# Altium PCB PCB_Sixth-Sense_2026-08-17.pcbdoc
Units mil, origin at the board's own origin, x right, y up, seen from the top; angles counter-clockwise.
Board outline 2630 x 2450 mil, 2 copper layers (Top Layer, Bottom Layer); 59 components, 43 nets, 260 pads, 59 vias.
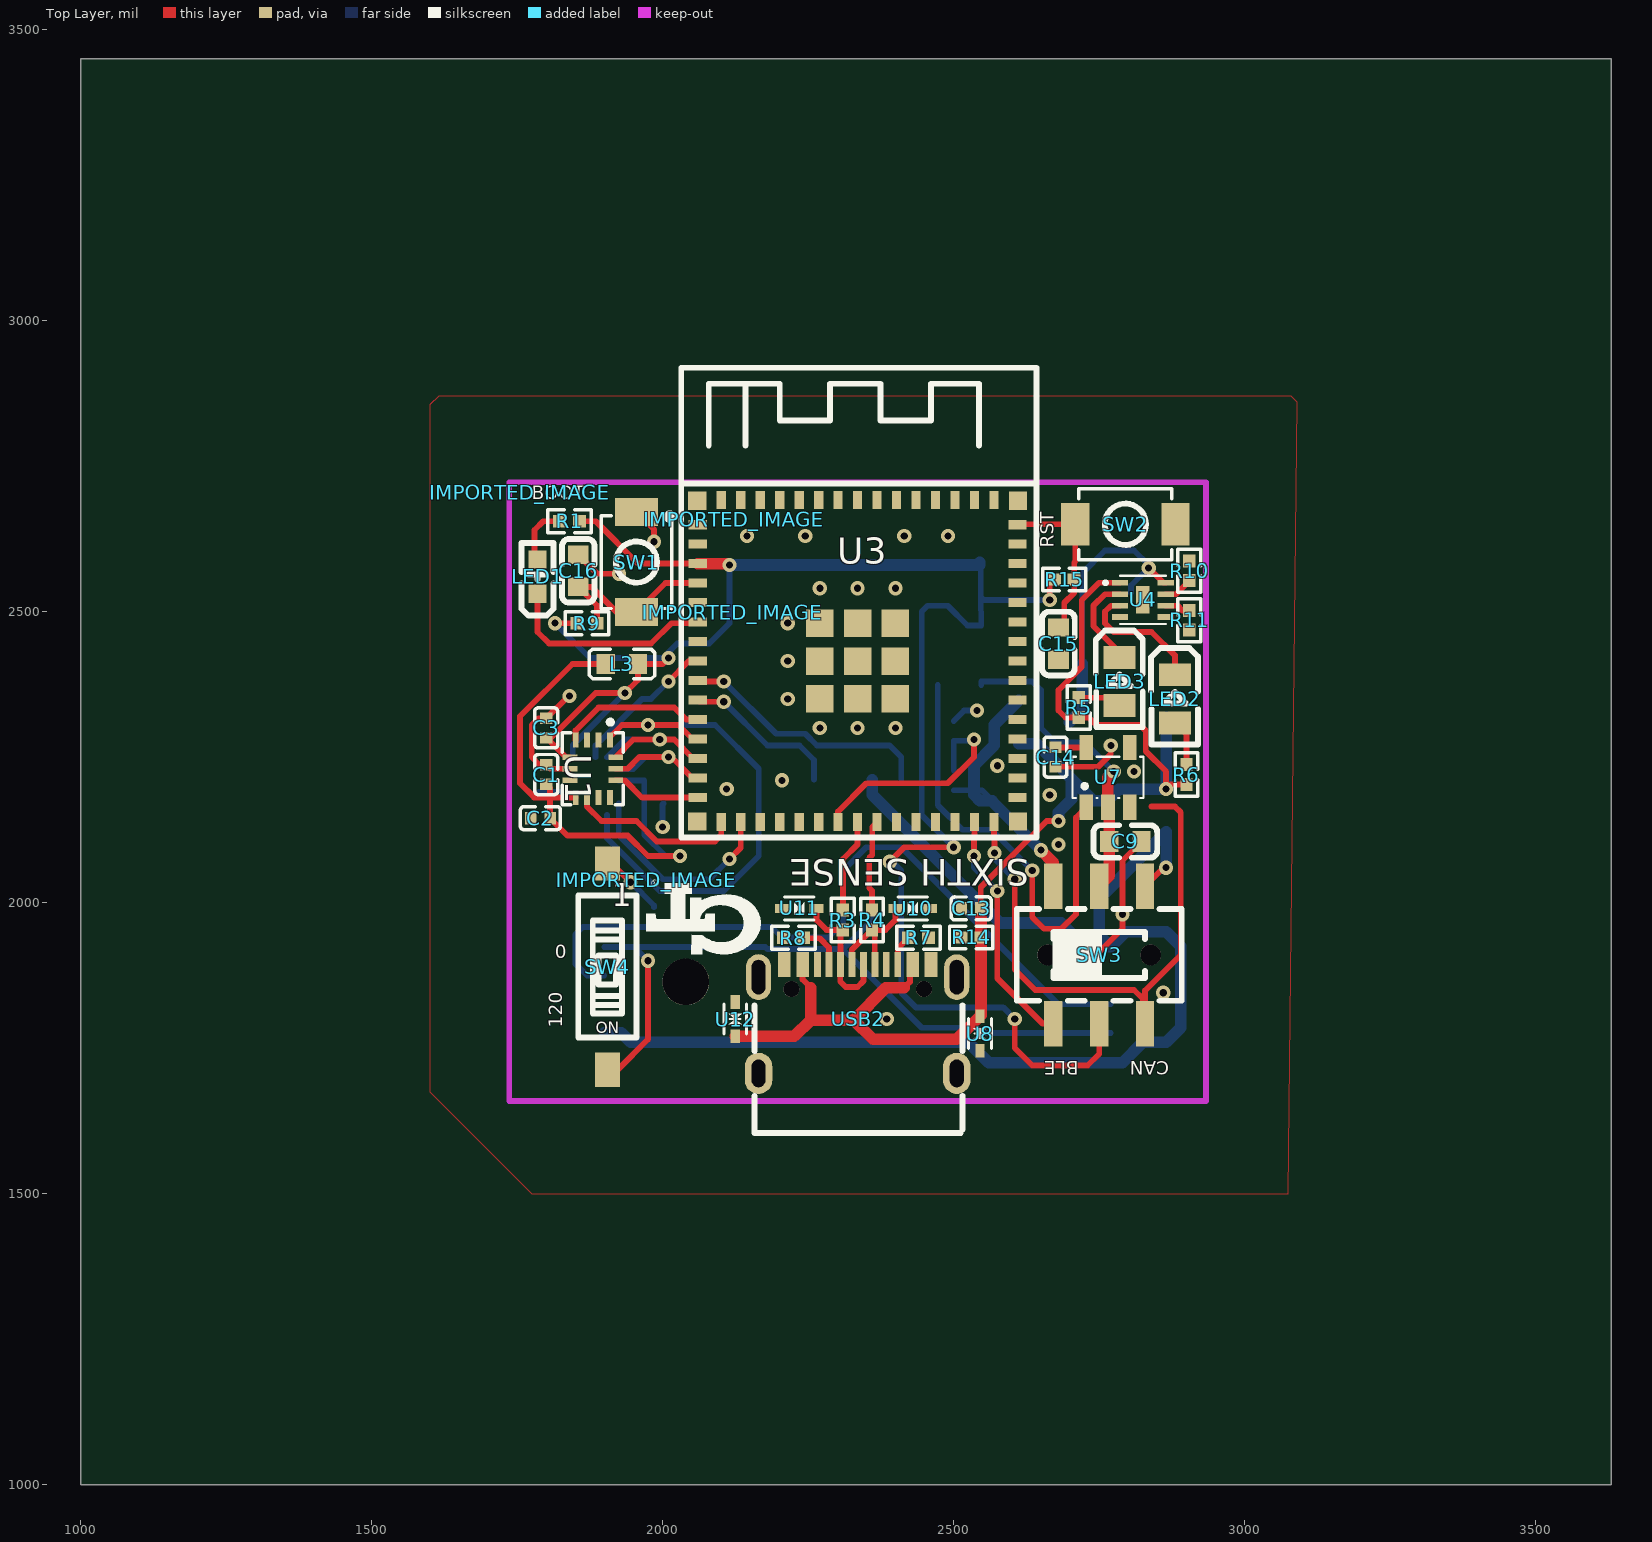
[diagram p0: Top Layer view]
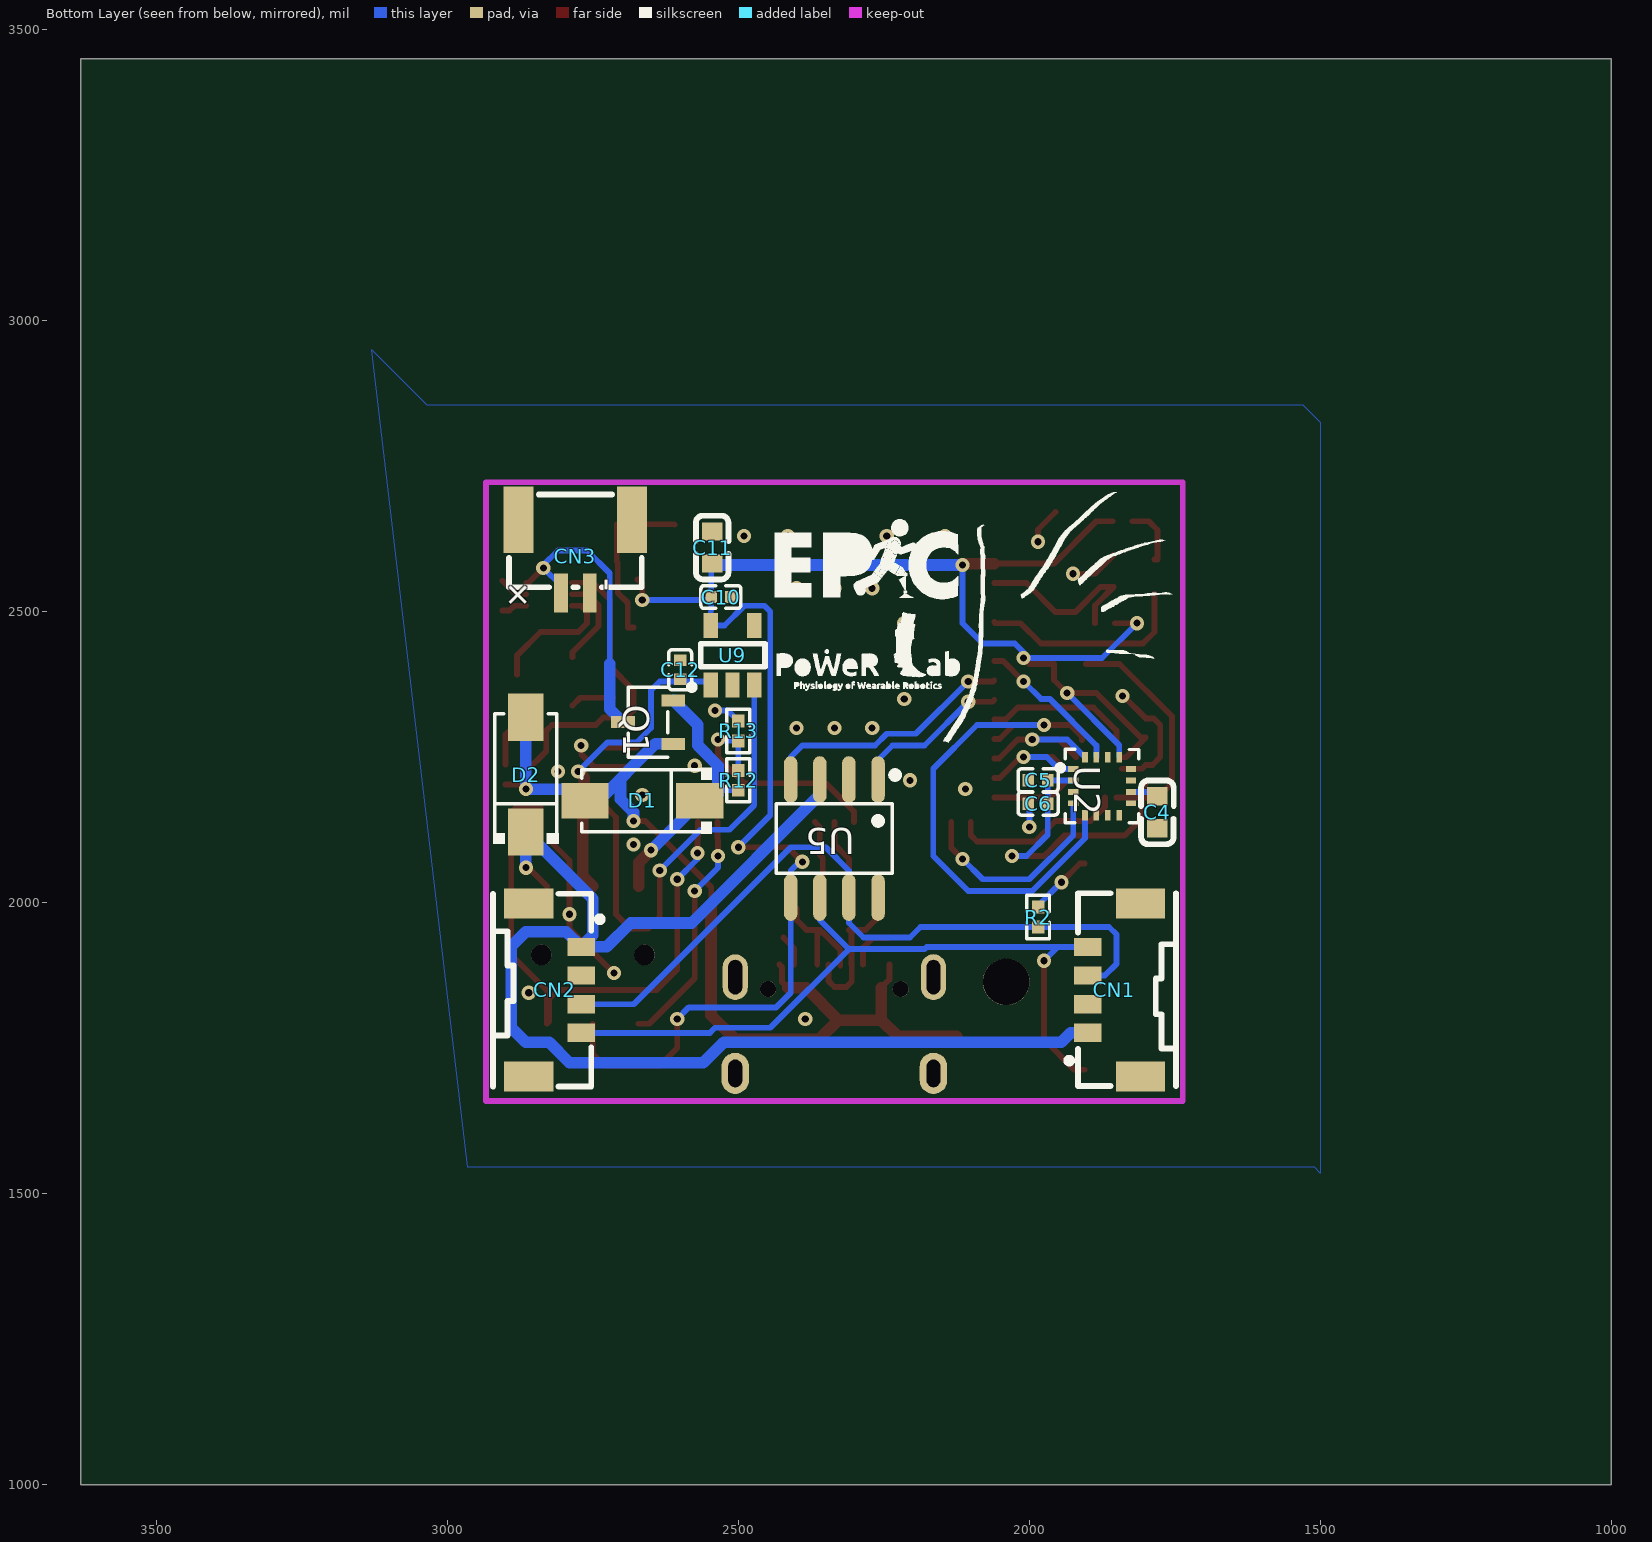
[diagram p1: Bottom Layer view, seen from below]

## Layer stack, top to bottom
Top Layer: signal copper (thickness not stored)
Dielectric: dielectric 12.6, FR-4, Dk 4.8
Bottom Layer: signal copper (thickness not stored)

## Board outline
3630,1000 1000,1000 1000,3450 3630,3450

## Components (designator, comment, footprint, x,y, rotation, side; value= is the part's Value field where it differs from the comment)
C1 "100nF" C0402#1 1800,2220 r90 top
C2 "2.2uF" C0402#1 1790,2145 r0 top
C3 "10nF" C0402#1 1800,2300 r90 top
C4 "10uF" C0603#1 1780,2155 r270 bottom
C5 "2.2uF" C0402#2 1985,2210 r0 bottom
C6 "100nF" C0402#2 1985,2170 r180 bottom
C9 "10uF" C0603#2 2795,2105 r0 top
C10 "100nF" C0402#2 2530,2525 r0 bottom
C11 "22uF" C0603#1 2545,2610 r270 bottom
C12 "1uF" C0402#2 2600,2400 r90 bottom
C13 "1uF" C0402#1 2530,1990 r0 top
C14 "1uF" C0402#1 2675,2250 r270 top
C15 "100nF" C0603#2 2680,2445 r270 top
C16 "100nF" C0603#2 1855,2570 r90 top
CN1 "5055670471" CONN-SMD_4P-P1.25_MOLEX_5055670471 1854.37,1850 r90 bottom
CN2 "5055670471" CONN-SMD_4P-P1.25_MOLEX_5055670471 2815,1850 r270 bottom
CN3 "XY-SM02B-GHS-TB" CONN-SMD_SM02B-GHS-TB-LF-SN 2780,2595 r180 bottom
D1 "SS54_C22452" SMA_L4.4-W2.8-LS5.4-R-RD 2665,2175 r180 bottom
D2 "SS54_C22452" SMA_L4.4-W2.8-LS5.4-R-RD 2865,2220 r270 bottom
IMPORTED_IMAGE "IMPORTED_IMAGE" IMPORTED_IMAGE 1754.35,2705.19 r0 top
IMPORTED_IMAGE "IMPORTED_IMAGE" IMPORTED_IMAGE 2122.52,2658.81 r0 top
IMPORTED_IMAGE "IMPORTED_IMAGE" IMPORTED_IMAGE 2119.22,2499.11 r0 top
IMPORTED_IMAGE "IMPORTED_IMAGE" IMPORTED_IMAGE 1971.61,2039.19 r0 top
L3 "600Ω" L0603 1930,2410 r180 top
LED1 "KT-0603R" LED-SMD_L1.6-W0.8-R-RD 1785,2560 r90 top
LED2 "0805 Yellow" LED0805-R-RD 2880,2350 r270 top
LED3 "0805G (Green)" LED0805-R-RD 2785,2380 r270 top
Q1 "SI2301CDS-T1-GE3" SOT-23-3_L3.0-W1.7-P0.95-LS2.9-BR 2655,2310 r0 bottom
R1 "2.2kΩ" R0402#1 1840,2655 r0 top
R2 "120Ω" R0402#2 1985,1975 r270 bottom
R3 "22Ω" R0402#1 2309.69,1969.84 r90 top
R4 "22Ω" R0402#1 2359.69,1969.84 r270 top
R5 "2.2kΩ" R0402#1 2715,2335 r270 top
R6 "2.2kΩ" R0402#1 2900,2220 r90 top
R7 "5.1kΩ" R0402#1 2439.69,1939.84 r0 top
R8 "5.1kΩ" R0402#1 2224.69,1939.84 r180 top
R9 "100kΩ" R0402#1 1870,2480 r0 top
R10 "120kΩ" R0402#1 2905,2570 r90 top
R11 "1MΩ" R0402#1 2905,2485 r270 top
R12 "100kΩ" R0402#2 2500,2210 r90 bottom
R13 "100kΩ" R0402#2 2500,2295 r90 bottom
R14 "100kΩ" R0402#1 2530,1940 r0 top
R15 "100kΩ" R0402#1 2690,2555 r180 top
SW1 "TS-1088-AR02016" SW-SMD_L3.9-W3.0-P4.45 1955,2585 r270 top
SW2 "TS-1088-AR02016" SW-SMD_L3.9-W3.0-P4.45 2795,2650 r180 top
SW3 "MS-22D28-G020" SW-SMD_MS-22D28-G020 2750,1910 r180 top
SW4 "DSIC01LS-P_C600988" SW-SMD_2P-L3.5-W6.1-P2.54-LS9.8 1905,1890 r270 top
U1 "ICM-42607-P" LGA-14_L3.0-W2.5-P0.50-TL_QMI8658A 1880,2230 r270 top
U2 "MMC5983MA" LGA-16_L3.0-W3.0-P0.50-BL_SQ 1875,2200 r90 bottom
U3 "ESP32-S3-MINI-1-N8" BULETM-SMD_ESP32-S3-MINI-1-N8 2335,2415 r0 top
U4 "SGM40561-4.2YTDE8G/TR" TDFN-8L_L2.0-W2.0-P0.50-BL-EP 2825,2520 r270 top
U5 "TJA1051T/3/1J" SOIC-8_L4.9-W3.9-P1.27-LS6.0-BL 2335,2110 r180 bottom
U7 "TPS3840PL34DBVR" SOT-23-5_L3.0-W1.7-P0.95-LS2.8-BR 2765,2215 r270 top
U8 "LESD5D5.0CT1G-ES" SOD-523_L1.2-W0.8-LS1.6-BI 2545,1775 r90 top
U9 "AP2112K-3.3TRG1" SOT-25-5_L2.9-W1.6-P0.95-LS2.8-BL 2510,2425 r0 bottom
U10 "LESD5D5.0CT1G-ES" SOD-523_L1.2-W0.8-LS1.6-BI 2429.69,1989.84 r180 top
U11 "LESD5D5.0CT1G-ES" SOD-523_L1.2-W0.8-LS1.6-BI 2234.69,1989.84 r0 top
U12 "LESD5D5.0CT1G-ES" SOD-523_L1.2-W0.8-LS1.6-BI 2124.69,1799.84 r270 top
USB2 "TYPE-C 16PIN 2MD(073)" USB-C-SMD_TYPE-C-6PIN-2MD-073 2335,1800 r0 top

## Footprints (in the part's own frame and the unit in brackets; to place one, negate y for a bottom-side part, rotate by r counter-clockwise, add the part's x,y. Pads: shape width x height; smd on the part's side, far side on the other; paste and mask are expansions set on the pad)
BULETM-SMD_ESP32-S3-MINI-1-N8 [mm]
  rect 0.8x0.4 smd paste+0 mask+0.05: 1(-6.975,5.95) 2(-6.975,5.1) 3(-6.975,4.25) 4(-6.975,3.4) 5(-6.975,2.55) 6(-6.975,1.7) 7(-6.975,0.85) 8(-6.975,0) 9(-6.975,-0.85) 10(-6.975,-1.7) 11(-6.975,-2.55) 12(-6.975,-3.4) 13(-6.975,-4.25) 14(-6.975,-5.1) 15(-6.975,-5.95) 31(6.975,-5.95) 32(6.975,-5.1) 33(6.975,-4.25) 34(6.975,-3.4) 35(6.975,-2.55) 36(6.975,-1.7) 37(6.975,-0.85) 38(6.975,0) 39(6.975,0.85) 40(6.975,1.7) 41(6.975,2.55) 42(6.975,3.4) 43(6.975,4.25) 44(6.975,5.1) 45(6.975,5.95)
  rect 0.4x0.8 smd paste+0 mask+0.05: 16(-5.95,-7.025) 17(-5.1,-7.025) 18(-4.25,-7.025) 19(-3.4,-7.025) 20(-2.55,-7.025) 21(-1.7,-7.025) 22(-0.85,-7.025) 23(0,-7.025) 24(0.85,-7.025) 25(1.7,-7.025) 26(2.55,-7.025) 27(3.4,-7.025) 28(4.25,-7.025) 29(5.1,-7.025) 30(5.95,-7.025) 46(5.95,7.025) 47(5.1,7.025) 48(4.25,7.025) 49(3.4,7.025) 50(2.55,7.025) 51(1.7,7.025) 52(0.85,7.025) 53(0,7.025) 54(-0.85,7.025) 55(-1.7,7.025) 56(-2.55,7.025) 57(-3.4,7.025) 58(-4.25,7.025) 59(-5.1,7.025) 60(-5.95,7.025)
  rect 0.8x0.8 smd paste+0 mask+0.05: GND(-7,-7) GND(-7,7) GND(7,-7) GND(7,7)
  rect 1.2x1.2 smd paste+0 mask+0.05: GND(-1.65,-1.65) GND(-1.65,0) GND(-1.65,1.65) GND(0,-1.65) GND(0,0) GND(0,1.65) GND(1.65,-1.65) GND(1.65,0) GND(1.65,1.65)
  silkscreen extent -8.34,-7.7 7.8,12.8
C0402#1 [mm]
  rect 0.5x0.54 smd paste+0 mask+0.051: 1(-0.42,0) 2(0.42,0)
  silkscreen extent -0.87,-0.5 0.87,0.5
C0402#2 [mm]
  rect 0.5x0.54 smd paste+0 mask+0.051: 1(0.42,0) 2(-0.42,0)
  silkscreen extent -0.87,-0.5 0.87,0.5
C0603#1 [mm]
  rect 0.8x0.9 smd paste+0 mask+0.051: 1(0.7,0) 2(-0.7,0)
  silkscreen extent -1.39,-0.71 1.39,0.71
C0603#2 [mm]
  rect 0.8x0.9 smd paste+0 mask+0.051: 1(-0.7,0) 2(0.7,0)
  silkscreen extent -1.39,-0.71 1.39,0.71
CONN-SMD_4P-P1.25_MOLEX_5055670471 [mm]
  rect 0.8x1.2 smd paste+0 mask+0.05: 1(-1.875,1.147) 2(-0.625,1.147) 3(0.625,1.147) 4(1.875,1.147)
  rect 1.3x2.15 smd paste+0 mask+0.05: 5(3.775,-1.148) 6(-3.775,-1.148)
  silkscreen extent -4.2,-2.7 4.22,2.09
CONN-SMD_SM02B-GHS-TB-LF-SN [mm]
  rect 0.6x1.7 smd paste+0 mask+0.051: 1(0.625,-1.6) 2(-0.625,-1.6)
  rect 1.3x2.9 smd paste+0 mask+0.051: 3(-2.475,1.6) 4(2.475,1.6)
  silkscreen extent -2.9,-1.35 2.9,2.7
IMPORTED_IMAGE [mil]
L0603 [mm]
  rect 0.8x0.864 smd paste-100 mask+0.051: 1(-0.7,0) 2(0.7,0)
  silkscreen extent -1.42,-0.65 1.42,0.65
LED0805-R-RD [mm]
  rect 1x1.4 smd paste+0 mask+0.051: 1(1.05,0) 2(-1.05,0)
  silkscreen extent -2.22,-1.04 1.99,1.01
LED-SMD_L1.6-W0.8-R-RD [mm]
  rect 0.8x0.8 smd paste+0 mask+0.051: 1(0.75,0) 2(-0.75,0)
  silkscreen extent -1.7,-0.7 1.47,0.7
LGA-14_L3.0-W2.5-P0.50-TL_QMI8658A [mm]
  rect 0.65x0.25 smd paste+0 mask+0.051: 1(-1.25,0.75) 2(-1.25,0.25) 3(-1.25,-0.25) 4(-1.25,-0.75) 8(1.25,-0.75) 9(1.25,-0.25) 10(1.25,0.25) 11(1.25,0.75)
  rect 0.25x0.65 smd paste+0 mask+0.051: 5(-0.5,-1) 6(0,-1) 7(0.5,-1) 12(0.5,1) 13(0,1) 14(-0.5,1)
  silkscreen extent -2.13,-1.33 1.58,1.33
LGA-16_L3.0-W3.0-P0.50-BL_SQ [mm]
  rect 0.25x0.45 smd paste+0 mask+0.051: 1(0.75,1.263) 2(0.25,1.263) 3(-0.25,1.263) 4(-0.75,1.263) 9(-0.75,-1.263) 10(-0.25,-1.263) 11(0.25,-1.263) 12(0.75,-1.263)
  rect 0.45x0.25 smd paste+0 mask+0.051: 5(-1.263,0.75) 6(-1.263,0.25) 7(-1.263,-0.25) 8(-1.263,-0.75) 13(1.263,-0.75) 14(1.263,-0.25) 15(1.263,0.25) 16(1.263,0.75)
  silkscreen extent -1.61,-1.6 1.61,1.95
R0402#1 [mm]
  rect 0.566x0.54 smd paste-100 mask+0.051: 1(-0.433,0) 2(0.433,0)
  silkscreen extent -0.94,-0.5 0.94,0.5
R0402#2 [mm]
  rect 0.566x0.54 smd paste-100 mask+0.051: 1(0.433,0) 2(-0.433,0)
  silkscreen extent -0.94,-0.5 0.94,0.5
SMA_L4.4-W2.8-LS5.4-R-RD [mil]
  rect 81.2x60.59 smd paste+0 mask+2: 1(-98.57,0) 2(98.57,0)
  silkscreen extent -104,-56 119,56
SOD-523_L1.2-W0.8-LS1.6-BI [mm]
  rect 0.6x0.4 smd paste+0 mask+0.051: 1(-0.75,0) 2(0.75,0)
  silkscreen extent -0.65,-0.5 0.65,0.5
SOIC-8_L4.9-W3.9-P1.27-LS6.0-BL [mm]
  oval 0.588x2.045 smd paste+0 mask+0.051: 1(1.905,2.57) 2(0.635,2.57) 3(-0.635,2.57) 4(-1.905,2.57) 5(-1.905,-2.57) 6(-0.635,-2.57) 7(0.635,-2.57) 8(1.905,-2.57)
  silkscreen extent -2.53,-1.52 2.8,2.92
SOT-23-3_L3.0-W1.7-P0.95-LS2.9-BR [mm]
  rect 1.037x0.532 smd paste+0 mask+0.051: 1(-1.101,0.95) 2(-1.101,-0.95) 3(1.101,0)
  silkscreen extent -0.86,-1.53 0.86,1.53
SOT-23-5_L3.0-W1.7-P0.95-LS2.8-BR [mm]
  rect 1.1x0.6 smd paste+0 mask+0.051: 1(1.3,-0.95) 2(1.3,0) 3(1.3,0.95) 4(-1.3,0.95) 5(-1.3,-0.95)
  silkscreen extent -0.9,-1.55 0.9,1.55
SOT-25-5_L2.9-W1.6-P0.95-LS2.8-BL [mil]
  rect 24.5x43.5 smd paste+0 mask+2: 1(37.39,51.18) 2(0.03,51.18) 3(-37.39,51.18) 4(-37.39,-51.18) 5(37.39,-51.18)
  silkscreen extent -56,-20 75,60
SW-SMD_2P-L3.5-W6.1-P2.54-LS9.8 [mm]
  rect 1.5x1.1 smd paste+0 mask+0.051: 1(-4.5,0) 2(4.5,0)
  silkscreen extent -3.1,-1.27 3.1,1.27
SW-SMD_L3.9-W3.0-P4.45 [mm]
  rect 1.23x1.86 smd paste+0 mask+0.051: 1(-2.185,0) 2(2.185,0)
  silkscreen extent -2.03,-1.54 2.03,1.54
SW-SMD_MS-22D28-G020 [mm]
  rect 0.8x2 smd paste+0 mask+0.051: 1(-2,3) 2(0,3) 3(2,3) 4(-2,-3) 5(0,-3) 6(2,-3)
  round 0.9 hole 0.9 unplated paste+0: ""(-2.25,0) ""(2.25,0)
  silkscreen extent -3.6,-2 3.6,2
TDFN-8L_L2.0-W2.0-P0.50-BL-EP [mm]
  rect 0.25x0.7 smd paste+0 mask+0.051: 1(-0.75,-1) 2(-0.25,-1) 3(0.25,-1) 4(0.75,-1) 5(0.75,1) 6(0.25,1) 7(-0.25,1) 8(-0.75,1)
  rect 1.2x0.6 smd paste+0 mask+0.051: 9(0,0)
  silkscreen extent -1.05,-1.63 1.05,1
USB-C-SMD_TYPE-C-6PIN-2MD-073 [mm]
  rect 0.55x1.1 smd paste-100 mask+0.05: 1(-3.2,2.375) 2(-2.4,2.375) 11(2.4,2.375) 12(3.2,2.375)
  rect 0.3x1.1 smd paste-100 mask+0.05: 3(-1.75,2.375) 4(-1.25,2.375) 5(-0.75,2.375) 6(-0.25,2.375) 7(0.25,2.375) 8(0.75,2.375) 9(1.25,2.375) 10(1.75,2.375)
  oval 1.2x1.8 hole 0.6 slot 1.2 at 90 deg paste+0 mask+0.05: 13(-4.325,-2.375) 14(4.325,-2.375)
  oval 1.1x2 hole 0.6 slot 1.5 at 90 deg paste+0 mask+0.05: 13(-4.325,1.825) 14(4.325,1.825)
  round 0.7 hole 0.7 unplated paste+0: ""(-2.89,1.305) ""(2.89,1.305)
  silkscreen extent -4.5,-4.97 4.57,0.6

## Free pads (board coordinates)
  round 80 hole 80 unplated paste+0: ""(2039.73,1863.82)

## Via types
v1: diameter 24.41, hole 12.2, Top Layer to Bottom Layer, tented both sides, 59 vias

## Nets (pads, with @x,y where several pads share a name; then routed paths per layer and width w, separated by ;. In a path a pad name is that pad's centre, name@x,y a point inside that pad or via, vN(x,y) a via of type N, cw(c..) or ccw(c..) an arc to the next point about the centre after c; other vN are vias at no path point)
3V3: C3.1 C10.1 C11.1 L3.1 R1.2 R9.1 R15.2 SW3.2 U1.5 U2.13 U3.3 U5.5 U9.5 | length 3354
  Top Layer w10: C3.1 1833.78,2249.68 U1.5 ; C3.1 1808.5,2283.5 1885,2360 v1(1935,2360) 1957.56,2382.56 L3.1 2000,2410 v1(2010,2420) ; v1(1815,2480) R9.1 ; R1.2 1885,2655 1957.7,2582.3 U3.3 ; v1(2390,2070) 2415,2095 v1(2500,2095) ; v1(2605,1800) 2605,1750 2635,1720 2730,1720 2750,1740 SW3.2 ; v1(2665,2520) 2665,2547.04 R15.2
  Top Layer w20: U3.3 2112.67,2582.33 v1(2115,2580)
  Bottom Layer w10: v1(1815,2480) 1875,2420 v1(2010,2420) 2010,2430 2025,2445 2080,2445 2115,2480 v1(2115,2580) ; U2.13 1845.48,2270.48 v1(1935,2360) ; v1(2390,2070) 2395,2070 2410,2055 U5.5 2410,1845 2435,1820 2585,1820 v1(2605,1800) ; v1(2500,2095) 2445,2150 2445,2500 2455,2510 2490,2510 2523.8,2476.2 U9.5 C10.1 ; C11.1 2546.54,2580.91 C10.1 2551.54,2520 v1(2665,2520)
  Bottom Layer w20: v1(2115,2580) 2545,2580 C11.1@2545,2585
3V3F: C1.1 C2.2 C5.2 C6.1 L3.2 U1.8 U2.2 | length 930.7
  Top Layer w10: C1.1 1806.53,2196.93 C2.2 1836.53,2115 1940,2115 1975,2080 v1(2030,2080) ; U1.8 1779.2,2180.8 1755,2205 1755,2320 1845,2410 L3.2
  Bottom Layer w10: U2.2 C5.2 ; C5.2 C6.1 1968.46,2116.54 2005,2080 v1(2030,2080)
+5V: C9.1 C12.2 SW3.5 U7.2 U9.1 | length 545.3
  Top Layer w20: SW3.5 2767.4,2045.6 C9.1 ; C9.1 2767.44,2161.37 U7.2 2765,2215 v1(2775,2225)
  Bottom Layer w10: U9.1 2547.4,2380 2635,2380 2650,2365 2650,2300 2675,2275 2725,2275 v1(2775,2225)
BLE_SET: SW3.3 U3.29 | length 413.6
  Top Layer w10: v1(2535,2080) U3.29 ; v1(2575,2020) 2575,1870 2653.1,1791.9 SW3.3
  Bottom Layer w10: v1(2535,2080) 2535,2060 v1(2575,2020)
BOOT_GPIO0: C16.1 R9.2 SW1.2 U3.4 | length 319.8
  Top Layer w10: R9.2 1887.04,2510.4 C16.1 1877.56,2542.44 1921.02,2498.98 SW1.2 2004.88,2548.86 U3.4
CAN_SET: SW3.1 U3.30 | length 995.9
  Top Layer w10: U3.30 v1(2570,2085) ; v1(2605,2040) 2605,1885 2640,1850 2810,1850 2825,1835 2825,1795.6 SW3.1 2828.7,1848.7 2890,1910 2890,2155 2880,2165 2840,2165
  Bottom Layer w10: v1(2570,2085) 2570,2075 v1(2605,2040)
CANH: CN1.3 CN2.3 R2.1 U5.7 | length 1269.2
  Bottom Layer w10: CN1.3@1899.55,1874.61 1870.39,1874.61 1850,1895 1850,1945 1862.96,1957.96 R2.1 2187.04,1957.96 2205,1940 2285,1940 2310,1965 U5.7 2309.9,2054.7 2349.9,2095 2410,2095 2679.6,1825.4 CN2.3
CANL: CN1.4 CN2.4 SW4.2 U5.6 | length 1352.8
  Top Layer w10: SW4.2 1922.83,1712.83 1975,1765 v1(1975,1900)
  Bottom Layer w10: CN1.4@1899.55,1923.82 1951.18,1923.82 v1(1975,1900) ; CN1.4@1899.6,1923.8 2176.2,1923.8 2180,1920 2310,1920 ; U5.6 2360,1970 2310,1920 ; CN2.4 2548.8,1776.2 2540,1785 2445,1785 2310,1920
D+: R4.2 U10.2 USB2.6 USB2.8 | length 200.6
  Top Layer w10: USB2.6@2324.89,1892.14 2324.89,1918.86 2354.37,1948.34 2364.52,1948.34 USB2.8 ; R4.2 2382.65,1952.8 2400.16,1970.31 U10.2
D-: R3.1 U11.2 USB2.5 USB2.7 | length 237.4
  Top Layer w10: U11.2 2264.22,1970.31 2281.73,1952.8 R3.1 2305.47,1948.58 USB2.5 ; USB2.5@2305.19,1892.14 2305.19,1864.34 2314.69,1854.84 2334.69,1854.84 2344.84,1864.99 USB2.7
ESPLED: LED1.2 U3.6 | length 364.4
  Top Layer w10: LED1.2 1785,2465 1805,2445 1980,2445 2015,2480 2058.5,2480 U3.6
GND: C1.2 C2.1 C3.2 C4.1 C5.1 C6.2 C9.2 C10.2 C11.2 C12.1 C13.1 C14.2 C15.2 C16.2 CN1.2 CN1.5 CN1.6 CN2.2 CN2.5 CN2.6 CN3.1 CN3.3 CN3.4 R7.2 R8.2 R10.2 R11.2 R13.1 R14.1 SW1.1 SW2.1 U1.6 U2.9 U2.11 U3.1 U3.2 U3.42 U3.43 U3.46 U3.47 U3.48 U3.49 U3.50 U3.51 U3.52 U3.53 U3.54 U3.55 U3.56 U3.57 U3.58 U3.59 U3.60 U3.GND U4.5 U4.9 U5.2 U7.3 U8.1 U9.2 U10.1 U11.1 U12.1 USB2.1 USB2.12 USB2.13 USB2.14 | length 845.2
  Top Layer w10: C1.2 1788.5,2236.5 1775,2250 1775,2305 1786.5,2316.5 C3.2 ; C1.2 1806.53,2230 U1.6 ; C3.2 1838.47,2355 v1(1840,2355) ; C16.2 1887.56,2565 v1(1925,2565) ; SW1.1 1985,2641.02 v1(1985,2620) ; C14.2 2748.5,2233.5 2770,2255 v1(2770,2270) ; v1@2710,1875 2790,1955 v1(2790,1980) 2790,2072.44 C9.2
  Bottom Layer w10: v1(2000,2130) 2000,2168.47 C6.2 ; R13.1 2517.96,2330 v1(2540,2330)
  other v1: 2385,1800 2860,1845 2713.8,1878.79 2680,2100 2665,2185 2110,2195 2205,2210 2810,2225 2575,2235 2270,2300 2335,2300 2400,2300 2215,2350 2215,2415 2215,2480 2270,2540 2335,2540 2400,2540 2145,2630 2245,2630 2415,2630 2490,2630
INT_ICM1: U1.4 U3.11 | length 251
  Top Layer w10: U1.4 1850.5,2295.5 1890,2335 2020,2335 2040.4,2314.6 U3.11
INT_ICM2: U1.9 U3.16 | length 298.4
  Top Layer w10: U1.9 1870.2,2164.8 1895,2140 1955,2140 1990,2105 2090,2105 2100.7,2115.7 U3.16
INT_MAG: U2.15 U3.8 | length 255.8
  Top Layer w10: v1(2010,2380) 2045,2415 U3.8
  Bottom Layer w10: U2.15@1884.9,2249.7 1884.9,2269.9 1965,2350 1980,2350 v1(2010,2380)
LDO_EN: U7.1 U9.3 | length 780.1
  Top Layer w10: v1(2635,2055) 2635,1975 2655,1955 2685,1955 2710,1980 2710,2146.21 U7.1
  Bottom Layer w10: U9.3 2472.6,2167.4 2515,2125 2565,2125 v1(2635,2055)
LED1_1: LED1.1 R1.1 | length 104.6
  Top Layer w10: LED1.1 1780,2589.53 1780,2640 1795,2655 R1.1
LED2_1: LED2.1 R6.2 | length 79.9
  Top Layer w10: LED2.1 2900,2288.65 R6.2
LED3_1: LED3.1 R5.1 | length 75.5
  Top Layer w10: R5.1 2771.61,2352.04 LED3.1
RESET_EN: C15.1 R15.1 SW2.2 U3.45 | length 294.9
  Top Layer w10: U3.45 2610.35,2650 SW2.2 2708.98,2586.02 2707.04,2584.08 R15.1 ; C15.1 2690,2472.6 2690,2515 2707,2532 R15.1
RX_CAN: U3.9 U5.4 | length 442.9
  Top Layer w10: U3.9 2061.93,2380 v1(2105,2380)
  Bottom Layer w10: v1(2105,2380) 2195,2290 2245,2290 2265,2270 2390,2270 2410,2250 U5.4
SOC: R12.1 R13.2 U3.22 | length 407.1
  Top Layer w10: U3.22 2301.5,2156.5 2350,2205 2489.9,2205 2534.9,2249.8 v1(2535,2280)
  Bottom Layer w10: R12.1 R13.2 2532.96,2277.96 v1(2535,2280)
SPI_CS_1: U1.12 U3.15 | length 153.3
  Top Layer w10: U1.12 1934.7,2210.3 1964.3,2180.7 U3.15@2060.4,2180.7
SPI_CS_2: U2.4 U3.17 | length 362.6
  Top Layer w10: v1(2115,2075) 2134.21,2094.21 U3.17
  Bottom Layer w10: U2.4 1924.7,2115.3 2000,2040 2080,2040 v1(2115,2075)
SPI_SCLK: U1.13 U2.1 U3.14 | length 257.9
  Top Layer w10: U1.13 1940,2230 1960,2250 v1(2010,2250) 2015,2250 2050.8,2214.2 U3.14
  Bottom Layer w10: U2.1 1949.5,2229.5 1970,2250 v1(2010,2250)
SPI_SDI: U1.14 U2.16 U3.13 | length 270
  Top Layer w10: U1.14 1949.69,2280 v1(1995,2280) 2020,2280 2052.3,2247.7 U3.13
  Bottom Layer w10: U2.16 1934.82,2280 v1(1995,2280)
SPI_SDO: U1.1 U2.5 U3.12 | length 908.3
  Top Layer w10: U1.1 1909.5,2284.5 1930,2305 2027.3,2305 2051.2,2281.1 U3.12
  Bottom Layer w10: U2.5 1904.53,2110.47 1995,2020 2105,2020 2165,2080 2165,2230 2090,2305 v1(1975,2305)
SW4_1: R2.2 SW4.1 | length 112.9
  Top Layer w10: SW4.1 1912.83,2067.17 v1(1945,2035)
  Bottom Layer w10: v1(1945,2035) 1985,1995 R2.2
TX_CAN: U3.10 U5.1 | length 276.1
  Top Layer w10: U3.10 2063.47,2345 v1(2105,2345)
  Bottom Layer w10: v1(2105,2345) 2180,2270 2235,2270 2260,2245 U5.1
U2_10: C4.2 U2.10 | length 48.4
  Bottom Layer w10: C4.2 1787.6,2190.16 U2.10
U3_23: R3.2 U3.23 | length 162
  Top Layer w10: R3.2 2309.69,2074.69 2335,2100 U3.23
U3_24: R4.1 U3.24 | length 159.1
  Top Layer w10: R4.1 2359.69,2020.31 2355,2025 2355,2076.84 2360,2081.84 2360,2129.97 U3.24
U4_2: LED3.2 U4.2 | length 161.1
  Top Layer w10: LED3.2 2785,2430 2740,2475 2740,2510 2759.82,2529.82 U4.2
U4_3: LED2.2 U4.3 | length 226.2
  Top Layer w10: U4.3@2785.6,2510.1 2770.1,2510.1 2760,2500 2760,2480 2775,2465 2840,2465 2880,2425 LED2.2
U4_6: R11.1 U4.6 | length 44
  Top Layer w10: U4.6@2864.4,2510.1 2884.9,2510.1 2893,2502 R11.1
U4_7: R10.1 U4.7 | length 50.2
  Top Layer w10: U4.7 2881.86,2529.82 R10.1
U7_5: C14.1 U7.5 | length 52.6
  Top Layer w10: C14.1 U7.5
USB2_4: R8.1 USB2.4 | length 80.3
  Top Layer w10: R8.1 2242.91,1938.66 2269.69,1938.66 2285.79,1922.56 USB2.4
USB2_10: R7.1 USB2.10 | length 54.1
  Top Layer w10: USB2.10 2403.9,1921.09 R7.1
VBAT: CN3.2 Q1.3 U4.8 | length 506.4
  Top Layer w10: v1(2835,2575) 2860.48,2549.52 U4.8
  Bottom Layer w10: 2720.8,2410.1 2720.8,2565.8 2760,2605 2810,2605 2835,2580 v1(2835,2575) 2804.61,2544.61 CN3.2
  Bottom Layer w20: Q1.3 2720.83,2332.47 2720.83,2410.08
VBAT_C: D1.2 Q1.2 R12.2 SW3.6 | length 493.9
  Top Layer w20: v1(2650,2090) 2671.26,2068.74 SW3.6
  Bottom Layer w10: R12.2 2548.47,2192.96 D1.2
  Bottom Layer w20: Q1.2 2570,2305.8 2570,2270 2535,2235 2535,2185 2545,2175 D1.2 2566.4,2173.6 v1(2650,2090)
VCAN: CN1.1 CN2.1 D2.2 SW3.4 U5.3 | length 2226.4
  Top Layer w10: SW3.4 2860.63,2060 v1(2865,2060)
  Bottom Layer w20: CN1.1@1899.6,1776.2 1928.8,1776.2 1945,1760 2525,1760 2560,1725 2790,1725 2825,1760 2865,1760 2890,1785 2890,1925 2865,1950 2796,1950 CN2.1 ; U5.3 2360,2185 2580,1965 2685,1965 2726.2,1923.8 CN2.1 ; v1(2865,2060) D2.2 ; D2.2 2750,2006.4 2750,1943.6 CN2.1
VUSB: C13.2 D1.1 D2.1 Q1.1 R5.2 R6.1 R14.2 U4.1 U8.2 U12.2 USB2.2 USB2.11 | length 2271.8
  Top Layer w10: USB2.2 2240.51,1867.84 2254.69,1853.66 2254.69,1813.66 ; 2415,1855 2415,1854 2424.7,1863.7 2424.7,1888.7 USB2.11 ; C13.2 2546.5,2026.5 2660,2140 v1(2680,2140) ; U4.1 2749.5,2549.5 2720,2520 2720,2405 2680,2365 2680,2330 2692,2318 R5.2 2732,2318 2745,2305 2820,2305 2830,2295 2830,2260 2865,2225 v1(2865,2195) 2872.96,2202.96 R6.1
  Top Layer w20: U12.2 2226.03,1770.31 2254.22,1798.04 2254.69,1853.66 ; 2254.2,1798.1 2328.3,1798.1 ; 2414.7,1853.7 2383.4,1853.5 2328.3,1798.1 ; C13.2 2547.04,1989.49 R14.2 ; R14.2 2547,1806.6 2505.5,1765 2361.4,1765 2328.3,1798.1
  Bottom Layer w20: Q1.1 2642.4,2272.6 2740,2175 D1.1 ; v1(2680,2140) 2680,2155 2702.5,2177.5 2702.5,2212.5 ; D1.1 2783.57,2195 v1(2865,2195) D2.1
pads on no net: SW3. U1.2 U1.3 U1.7 U1.10 U1.11 U2.3 U2.6 U2.7 U2.8 U2.12 U2.14 U3.5 U3.7 U3.18 U3.19 U3.20 U3.21 U3.25 U3.26 U3.27 U3.28 U3.31 U3.32 U3.33 U3.34 U3.35 U3.36 U3.37 U3.38 U3.39 U3.40 U3.41 U3.44 U4.4 U5.8 U7.4 U9.4 USB2. USB2.3 USB2.9

## Polygon pours and split planes (outlines as drawn)
GND on Bottom Layer (solid): 3130,2950 3035,2855 1530,2855 1500,2825 1500,1535 1510,1545 2965,1545
GND on Top Layer (solid): 3090,2860 3080,2870 1615,2870 1600,2855 1600,1675 1775,1500 3075,1500

## Silkscreen, mask and mechanical layers (free items; w line width, h text height)
Top Overlay:
  text "BOOT" at 1775,2685 h39.37
  text "RST" at 2680,2610 h39.37 r90
  text "SIXTH SENSE" at 2630,2090 h78.74 r180
  text "0" at 1835,1935 h39.37 r180
  text "120" at 1835,1785 h39.37 r90
  text "BLE" at 2715,1735 h39.37 r180
  text "CAN" at 2870,1735 h39.37 r180
Bottom Overlay:
  text "-" at 2695,2535 h78.74 r270
  text "+" at 2835,2535 h78.74 r225

## Text inside footprints (layer, text, board x,y; h text height)
SW4: Top Overlay "ON" at 1885,1775.16 h19.68; Top Overlay "1" at 1912.48,1993.55 h39.37